# Allegro board MICROPHONEV2_0.brd
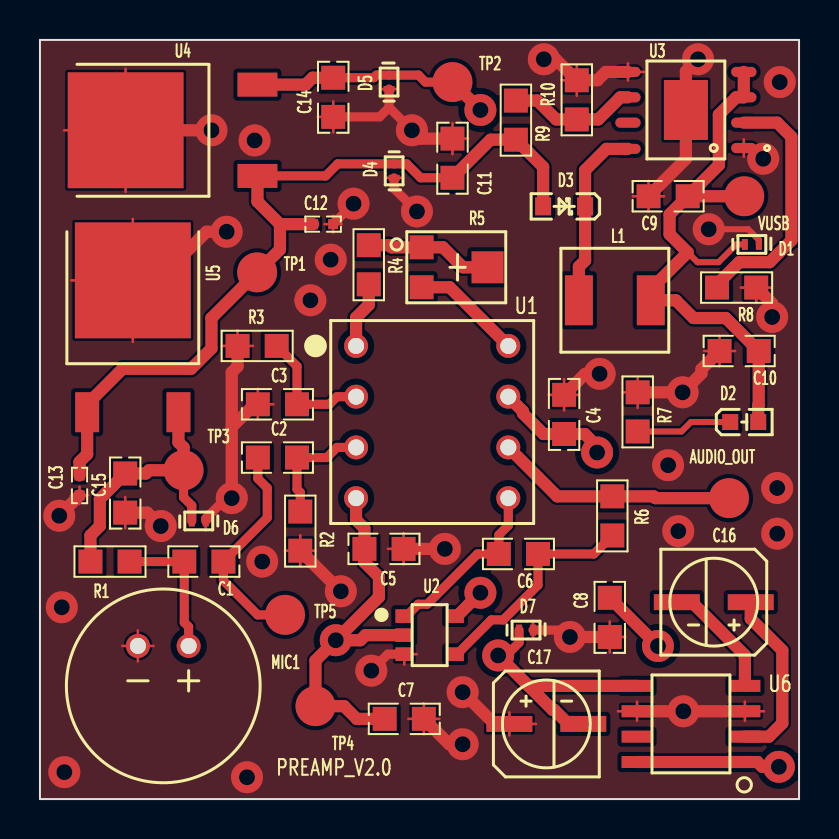
[diagram p0: board, top side]
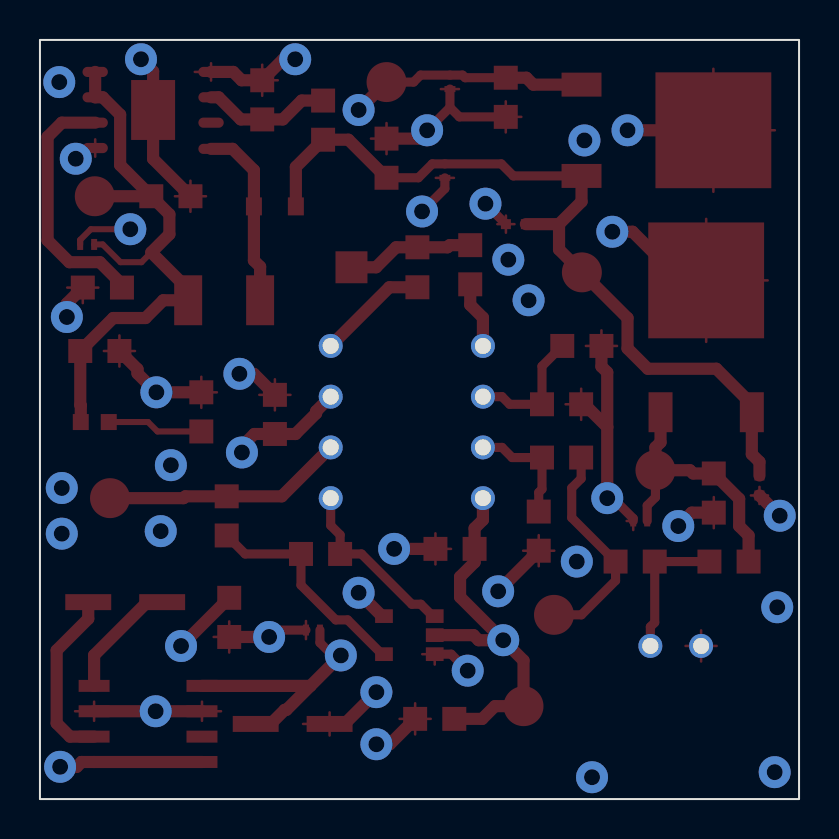
[diagram p1: board, bottom side, seen from below]

Outline 38 x 38 mm; copper layers: TOP, PWR, GND, BOTTOM. Coordinates in mm from the lower left corner of the outline.
Outline path: rectangle 0,0 38,38

## Design rules (mm)
constraint set DEFAULT: min track width 0.127

## Placement (name value [footprint] x y rotation side)
AUDIO_OUT  OUTPUT  [TPD2]  34.49 15.06 0 top
C1  10u  [SC0805]  8.2 11.89 0 top
C2  47u  [SC0805]  11.89 17.09 0 top
C3  47u  [SC0805]  11.89 19.76 0 top
C4  0.1u  [SC0805]  26.24 19.25 90 top
C5  0.1u  [SC0805]  17.22 12.52 180 top
C6  0.1u  [SC0805]  23.95 12.27 0 top
C7  0.1u  [SC0805]  18.24 4.01 0 top
C8  0.1u  [SC0805]  28.52 9.09 90 top
C9  10u  [SC0805]  31.45 30.18 180 top
C10  0.1u  [SC0805]  35 22.43 180 top
C11  10u  [SC0805]  20.65 32.08 270 top
C12  0.33u  [SC0402]  14.17 28.78 0 top
C13  0.33u  [SC0402]  1.98 15.7 270 top
C14  0.1u  [SC0805]  14.68 35.13 90 top
C15  0.1u  [SC0805]  4.27 15.32 90 top
C16  47u  [SMD5X5_4MM]  33.73 9.86 0 top
C17  47u  [SMD5X5_4MM]  25.35 3.76 180 top
D1  Vrwm=5.5V  [SOD882]  35.64 27.76 90 top
D2  Vf=2.3V  [SD0603]  35.26 18.87 0 top
D3  Vf=450mV  [SD0805]  26.24 29.67 180 top
D4  Vrwm=5.5V  [SOD882]  17.73 31.45 0 top
D5  Vrwm=5.5V  [SOD882]  17.48 35.89 180 top
D6  Vrwm=5.5V  [SOD882]  7.95 13.92 270 top
D7  Vrwm=5.5V  [SOD882]  24.33 8.46 90 top
L1  4.7u  [SMD5_4X5_2X3MM]  28.78 24.97 180 top
MIC1  GMI9767P-54DB  [THRUHOLE2X2_54]  6.17 5.66 180 top
R1  5k  [SR0805]  3.51 11.89 0 top
R2  2.2k  [SR0805]  13.03 13.41 270 top
R3  2.2k  [SR0805]  10.87 22.68 180 top
R4  7.15  [SR0805]  16.46 26.75 270 top
R5  1.5k  [SMDVARISTOR]  20.9 26.62 180 top
R6  1M  [SR0805]  28.65 14.17 270 top
R7  200  [SR0805]  29.92 19.38 90 top
R8  150k  [SR0805]  34.87 25.6 0 top
R9  110k  [SR0805]  23.83 33.99 270 top
R10  10k  [SR0805]  26.87 35 90 top
TP1  T POINT R  [TPD2]  10.87 26.37 0 top
TP2  T POINT R  [TPD2]  20.65 35.89 0 top
TP3  T POINT R  [TPD2]  7.19 16.46 0 top
TP4  T POINT R  [TPD2]  13.79 4.65 0 top
TP5  T POINT R  [TPD2]  12.27 9.22 0 top
U1  INA217  [DIP_8_ICS]  19.63 18.87 0 top
U2  OPA137  [SOT-23-5]  19.51 8.2 270 top
U3  FP6298  [SOP-8EP]  32.33 34.49 90 top
U4  CJ7805  [TO-252-2L]  7.19 33.48 0 top
U5  CJ7805  [TO-252-2L]  4.65 23.06 270 top
U6  LM2662  [SOIC-8]  32.59 3.76 180 top
VUSB  INPUT  [TPD2]  35.26 30.18 0 top

## Library data of the parts
AUDIO_OUT TP1-TP5 VUSB = T POINT R
C1-C15 = CAP NP
C16 C17 = CAP POL
D1 D4-D7 = DIODE TVS BI-DIR
D2 = LED
D3 = DIODE SCHOTTKY
L1 = INDUCTOR
MIC1 = GMI9767P-54DB
R1-R4 R6-R10 = RESISTOR
R5 = POT
U1 = INA217
U2 = OPA137
U3 = FP6298
U4 U5 = CJ7805
U6 = LM2662

## Footprints (pads in the part's own frame, mm; a bottom-side part is the same pattern mirrored in y, then rotated)
DIP_8_ICS
  round 1.2 hole 0.8: 1(-3.81,3.81) 2(-3.81,1.27) 3(-3.81,-1.27) 4(-3.81,-3.81) 5(3.81,-3.81) 6(3.81,-1.27) 7(3.81,1.27) 8(3.81,3.81)
SC0402
  rect 0.5x0.5 smd: 1(-0.5,0) 2(0.5,0)
SC0805
  rect 1.2x1.2 smd: 1(-0.98,0) 2(0.98,0)
SD0603
  rect 0.8x0.8 smd: 1(-0.7,0) 2(0.7,0)
SD0805
  rect 0.8x0.9 smd: 1(-1.05,0) 2(1.05,0)
SMD5_4X5_2X3MM
  rect 1.4x2.5 smd: 1(-1.8,0) 2(1.8,0)
SMD5X5_4MM
  rect 2.3x0.8 smd: 1(1.85,0) 2(-1.85,0)
SMDVARISTOR
  rect 1.2x1.2 smd: 1(1.8,-1) 3(1.8,1)
  rect 1.6x1.6 smd: 2(-1.5,0)
SOD882
  rect 0.55x0.3 smd: 1(0,-0.35) 2(0,0.35)
SOIC-8
  rect 1.55x0.6 smd: 1(-2.7,1.905) 2(-2.7,0.635) 3(-2.7,-0.635) 4(-2.7,-1.905) 5(2.7,-1.905) 6(2.7,-0.635) 7(2.7,0.635) 8(2.7,1.905)
SOP-8EP
  oval 0.51x1.27 smd: 1(-1.905,-2.9) 2(-0.635,-2.9) 3(0.635,-2.9) 4(1.905,-2.9) 5(1.905,2.9) 6(0.635,2.9) 7(-0.635,2.9) 8(-1.946,2.9)
  rect 3x2.2 smd: 9(0,0)
SOT-23-5
  rect 0.686x0.889 smd: 1(-0.953,-1.27) 2(0,-1.27) 3(0.953,-1.27) 4(0.953,1.27) 5(-0.953,1.27)
SR0805
  rect 1.2x1.2 smd: 1(-0.98,0) 2(0.98,0)
THRUHOLE2X2_54
  round 1.2 hole 0.8: 1(-1.27,-2) 2(1.27,-2)
TO-252-2L
  rect 2x1.2 smd: 1(3.7,-2.285) 3(3.7,2.285)
  rect 5.8x5.8 smd: 2(-2.9,0)
TPD2
  round 2 smd: 1(0,0)

## Nets
-VEE: C5.2 C7.1 C17.2 D7.2 TP4.1(TP) U1.4(V-) U2.2(V-) U6.5
GND: C3.1 C4.2 C5.1 C7.2 C8.1 C9.2 C10.2 C11.1 C12.2 C13.2 C14.1 C15.1 C17.1 D1.1 D4.1 D5.2 D6.2 D7.1 MIC1.2 R2.2 R3.2 R7.2 R8.2 R10.2 U2.3 U3.1 U3.5 U3.9 U4.2 U5.2 U6.3 U6.6
VCC: C4.1 C8.2 C14.2 D5.1 TP2.1(TP) U1.7 U2.5 U4.3(OUT) U6.1 U6.8(V+)
VECM: C15.2 D6.1 R1.1 TP3.1(TP) U5.3(OUT)
VUSB: C9.1 C10.1 D1.2 D2.2 L1.1 U3.3(VCC) U3.4 VUSB.1(TP)
N00244: C1.1 MIC1.1(MIC_OUT) R1.2
N00411: C1.2 C2.1 TP5.1(TP)
N00477: C2.2 R2.1 U1.3
N00514: C3.2 R3.1 U1.2
N00856: R4.2 U1.1
N00905: R4.1 R5.1 R5.2(WIPER)
N00940: R5.3 U1.8
N01252: AUDIO_OUT.1(TP) R6.1 U1.6
N01571: C6.2 R6.2 U2.4
N01619: C6.1 U1.5 U2.1
N05046: R8.1 U3.2
N05182: D3.1 L1.2 U3.8
N05806: C11.2 C12.1 C13.1 D3.2(CATHODE) D4.2 R9.2 TP1.1(TP) U4.1 U5.1
N05840: R9.1 R10.1 U3.6
N09826: C16.1 U6.2
N09833: C16.2 U6.4
N032101: D2.1(CATHODE) R7.1

Pads without a net: U3 7; U6 7

## Via types
v1: diameter 1.6, hole 0.8, TOP to BOTTOM, 41 vias

## Routing (per net, layer and track width the routed paths; a pad name or vN(x,y) marks a point on that pad's centre or on a via; arc(x,y) is an arc through that point)
-VEE: length 32.5
  TOP w0.457: D7.2 23.98,7.83 23.34,7.19 v1(22.94,7.19)
  TOP w0.61: U2.2 16.29,8.2 16.04,7.95 v1(14.81,7.95) ; v1(14.81,7.95) 16.97,10.11 16.97,11.13 16.24,11.85 C5.2 16.24,13.55 15.82,13.97 15.82,15.06 ; v1(14.81,7.95) 13.79,6.93 TP4.1 15.22,4.65 15.86,4.01 C7.1 ; 24.46,5.66 25.66,4.47 25.74,4.47 26.45,3.76 C17.2 ; 24.46,5.66 U6.5 ; 24.46,5.66 v1(22.94,7.19)
GND: length 163.7
  TOP w0.127: 29.43,35.97 U3.5 ; U3.5 30.25,36.4 ; U3.5 29.43,36.83 ; 4.9,6.89 MIC1.2 ; MIC1.2 5.68,7.66 ; MIC1.2 4.13,7.66 ; MIC1.2 4.9,8.44 ; 30.47,29.4 C9.2 ; C9.2 29.69,30.18 ; C9.2 31.24,30.18 ; C9.2 30.47,30.95 ; U5.2 4.65,29.04 ; U5.2 4.65,22.89 ; U5.2 1.57,25.96 ; 18.18,31.1 D4.1 17.28,31.1 ; 9.11,22.68 R3.2 ; R3.2 10.67,22.68 ; R3.2 9.89,23.46 ; C12.2 15.1,28.78 ; C12.2 14.67,29.21 ; C12.2 14.67,28.35 ; C12.2 14.25,28.78 ; 25.46,20.23 C4.2 ; C4.2 26.24,21.01 ; C4.2 27.02,20.23 ; C4.2 26.24,19.46 ; 4.27,13.56 C15.1 4.27,15.11 ; C11.1 21.43,33.06 ; C11.1 20.65,32.28 ; C11.1 20.65,33.84 ; 1.55,15.2 C13.2 ; C13.2 2.41,15.2 ; C13.2 1.98,14.77 ; C13.2 1.98,15.63 ; 12.25,12.43 R2.2 ; R2.2 13.03,13.21 ; R2.2 13.81,12.43 ; R2.2 13.03,11.65 ; C10.2 34.02,23.21 ; C10.2 34.02,21.65 ; C10.2 33.24,22.43 ; C10.2 34.8,22.43 ; 35.23,33.02 U3.1 35.23,32.16 ; 1.21,33.48 U4.2 ; U4.2 4.29,30.4 ; U4.2 4.29,36.56 ; R8.2 36.63,25.6 ; R8.2 35.85,24.83 ; R8.2 35.08,25.6 ; C3.1 11.69,19.76 ; C3.1 10.91,20.54 ; C3.1 10.91,18.98 ; C17.1 23.5,4.34 ; C17.1 24.83,3.76 ; C17.1 23.5,3.18 ; 18.24,6.73 U2.3 18.86,7.25 ; 18.44,4.01 C7.2 ; C7.2 20,4.01 ; C7.2 19.22,3.24 ; C7.2 19.22,4.79 ; 17.42,12.52 C5.1 ; C5.1 18.2,13.3 ; C5.1 18.2,11.75 ; C8.1 29.3,8.11 ; C8.1 28.52,8.89 ; C8.1 28.52,7.34 ; 17.93,35.54 D5.2 17.02,35.54 ; 8.63,13.92 D6.2 8.3,13.47 ; 13.9,34.15 C14.1 ; C14.1 14.68,34.93 ; C14.1 14.68,33.37 ; U6.6 29.89,4.87 ; U6.6 28.94,4.39 ; U6.6 29.89,3.92 ; 24.68,8.01 D7.1 24.68,8.91 ; 26.1,35.98 R10.2 ; R10.2 26.87,35.2 ; R10.2 26.87,36.76 ; R7.2 29.92,21.14 ; R7.2 29.92,19.58 ; R7.2 29.14,20.36 ; U6.3 35.29,4.87 ; U6.3 35.29,3.92 ; U6.3 36.24,4.39
  TOP w0.305: v1(33.48,28.52) 35.45,28.52 35.99,27.99 D1.1
  TOP w0.457: v1(9.6,15.06) 9.32,15.06 8.3,14.04 D6.2 ; v1(26.53,8.11) 26.18,8.46 D7.1 ; 17.48,34.62 17,34.15 C14.1 ; 17.48,34.62 v1(18.62,33.48) ; 17.48,34.62 D5.2 ; U2.3 17.41,7.25 v1(16.59,6.43) ; D4.1 17.73,30.56 v1(18.87,29.41) ; v1(36.21,32.05) 36.15,32.05 35.61,32.59 U3.1 ; C12.2 v1(15.7,29.8)
  TOP w0.61: R2.2 v1(15.06,10.4) ; 9.6,18.62 9.6,21.36 9.89,21.65 R3.2 ; 9.6,18.62 10.74,19.76 C3.1 ; 9.6,18.62 v1(9.6,15.06) ; U6.6 v1(32.21,4.39) U6.3 ; v1(36.65,24.13) 36.65,24.81 R8.2 ; C17.1 22.75,3.76 v1(21.16,5.35) ; C10.2 33.12,21.52 33.12,21.31 v1(32.17,20.36) R7.2 ; C7.2 20.49,2.74 v1(21.16,2.74) ; v1(28.02,21.29) 27.29,21.29 C4.2 ; v1(25.22,37.03) 25.82,37.03 R10.2 27.91,35.98 28.32,36.4 U3.5 ; C15.1 5.37,14.34 v1(6.05,13.67) ; U4.2 v1(8.59,33.48) ; C13.2 v1(0.97,14.18) ; C11.1 19.04,33.06 v1(18.62,33.48) ; C8.1 v1(26.53,8.11) ; C5.1 v1(20.27,12.52) ; v1(9.35,28.4) 8.33,28.4 5.9,25.96 U5.2 ; C9.2 32.33,32.04 U3.9 32.33,36.43 v1(32.94,37.03)
  GND w0.127: 4.13,7.66 MIC1.2 ; MIC1.2 4.9,8.44 ; MIC1.2 4.9,6.89 ; MIC1.2 5.68,7.66
  vias: v1(1.09,9.6) v1(1.22,1.35) v1(10.36,1.09) v1(10.74,32.97) v1(11.13,11.89) v1(13.54,24.97) v1(14.55,27) v1(31.45,16.71) v1(31.95,13.41) v1(36.91,15.57) v1(36.91,13.28) v1(37.03,35.89)
VCC: length 33.4
  TOP w0.457: TP2.1 19.3,35.89 18.95,36.24 D5.1 16.85,36.24 16.71,36.11 C14.2
  TOP w0.61: v1(22.05,10.33) 20.88,9.16 U2.5 ; U1.7 24.17,19.41 24.17,19.31 25.21,18.27 C4.1 27.27,18.27 27.89,17.65 v1(27.89,17.35) ; TP2.1 v1(22.05,34.49) ; C14.2 13.65,36.11 13.3,35.76 U4.3 ; C8.2 v1(30.94,7.66) ; U6.8 U6.1 35.92,1.85 36.16,1.61 v1(36.99,1.61)
  PWR w0.127: U1.7 23.44,20.92 ; U1.7 22.67,20.14 ; U1.7 23.44,19.37 ; U1.7 24.22,20.14
VECM: length 13.8
  TOP w0.457: D6.1 7.6,14.69 7.19,15.1 TP3.1
  TOP w0.61: R1.1 2.53,13.19 3,13.67 3,15.03 C15.2 5.3,16.3 5.46,16.46 TP3.1 7.19,17.6 6.93,17.86 U5.3
VUSB: length 30.6
  TOP w0.305: 32.43,27.37 32.92,26.87 33.97,26.87 34.86,27.76 D1.2
  TOP w0.61: D2.2 35.96,19.7 35.98,19.73 C10.1 34.33,24.08 32.72,24.08 31.83,24.97 L1.1 30.58,25.52 32.43,27.37 31.52,28.27 31.52,29.27 C9.1 ; C9.1 VUSB.1 ; C9.1 33.99,31.74 33.99,34.26 34.85,35.13 U3.3 U3.4
N00244: length 7.1
  TOP w0.457: R1.2 C1.1 7.22,8.84 7.44,8.62 MIC1.1
N00411: length 11.1
  TOP w0.457: TP5.1 10.9,9.22 9.18,10.93 C1.2 11.38,14.08 11.38,15.57 10.91,16.04 C2.1
N00477: length 5.9
  TOP w0.457: U1.3 14.87,17.6 14.36,17.09 C2.2 12.87,15.51 13.03,15.35 R2.1
N00514: length 6.5
  TOP w0.457: U1.2 14.87,20.14 14.49,19.76 C3.2 12.87,21.67 R3.1
N00856: length 3.3
  TOP w0.61: R4.2 16.46,24.74 15.82,24.1 U1.1
N00905: length 6.4
  TOP w0.61: R4.1 17.49,27.73 17.6,27.62 R5.1 20.17,27.62 21.17,26.62 R5.2
N00940: length 5.6
  TOP w0.61: U1.8 20.51,25.62 R5.3
N01252: length 12.1
  TOP w0.61: U1.6 25.89,15.15 R6.1 30.72,15.15 30.81,15.06 AUDIO_OUT.1
N01571: length 11.2
  TOP w0.457: U2.4 20.88,7.25 22.59,8.97 23.19,8.97 24.93,10.71 C6.2 27.73,12.27 R6.2
N01619: length 9
  TOP w0.457: U2.1 18.34,9.16 18.93,9.75 19.38,9.75 21.9,12.27 C6.1 22.97,13.22 23.44,13.7 23.44,15.06
N05046: length 12.7
  TOP w0.61: U3.2 36.91,33.86 37.62,33.15 37.62,27.97 36.53,26.87 35,26.87 33.89,25.77 R8.1
N05182: length 9.2
  TOP w0.61: U3.8 28.36,32.55 27.29,31.48 D3.1 27.29,26.96 26.98,26.65 L1.2
N05806: length 41.5
  TOP w0.457: C11.2 19.06,31.1 18.36,31.8 D4.2 14.9,31.8 14.3,31.19 U4.1
  TOP w0.61: C12.1 12.01,28.78 ; 12.01,28.78 10.89,29.9 U4.1 ; 12.01,28.78 12.01,27.51 TP1.1 8.59,24.08 8.59,22.56 7.57,21.54 4.14,21.54 2.36,19.76 U5.1 2.36,17.26 1.98,16.88 C13.1 ; C11.2 22.56,33.01 R9.2 25.19,31.64 D3.2
N05840: length 6.5
  TOP w0.61: R9.1 24.9,34.97 25.84,34.02 R10.1 27.95,34.02 29.06,35.13 U3.6
N09826: length 8.9
  TOP w0.61: C16.1 35.58,9.02 37.16,7.44 37.16,3.79 36.5,3.12 U6.2
N09833: length 6
  TOP w0.61: U6.4 35.29,7.2 32.63,9.86 C16.2
N032101: length 4.8
  TOP w0.305: R7.1 32.12,18.4 32.59,18.87 D2.1

## Copper pours and planes (outline as drawn; the poured copper is in the pictures)
-VEE on PWR: 14.43,11.63 17.22,11.63 19.89,8.97 24.21,8.97 26.49,6.68 27.64,6.68 28.65,5.66 28.65,0 11.51,0 11.51,5.54 13.54,7.57 13.54,10.74
GND on TOP: 0,38 38,38 38,0 0,0 ; 1 cut-out
GND on GND: 0,38 38,38 38,0 0,0
VCC on PWR: 10.49,38 23.7,38 23.7,36.14 27,32.84 27,20.02 28.91,20.02 30.3,18.62 30.3,12.4 31.45,11.25 31.57,11.38 38,11.38 38,0 29.16,0 29.16,7.32 27.13,9.35 21.41,9.35 20.78,9.98 20.78,11.13 21.67,12.01 23.83,12.01 24.97,13.16 24.97,17.98 24.08,18.87 23.19,18.87 22.17,19.89 22.17,28.02 18.36,31.83 13.67,31.83 10.49,35

## Text on the board
Ref Des/Silkscreen Top: PREAMP_V2.0
NCLEGEND-1-4: FIGURE | FINISHED_SIZE | 0.7999984 | DRILL CHART: TOP to BOTTOM | ALL UNITS ARE IN MILLIMETERS | PLATED | QTY | 51
